# Altium PCB Channel One.PcbDoc
Units mm, origin at the board's own origin, x right, y up, seen from the top; angles counter-clockwise.
Board outline 99.44 x 93.6 mm, 4 copper layers (Signal 1, Power Plane, Ground Plane, Signal 2), stack 0.778 mm thick; 130 components, 100 nets, 521 pads, 35 vias.
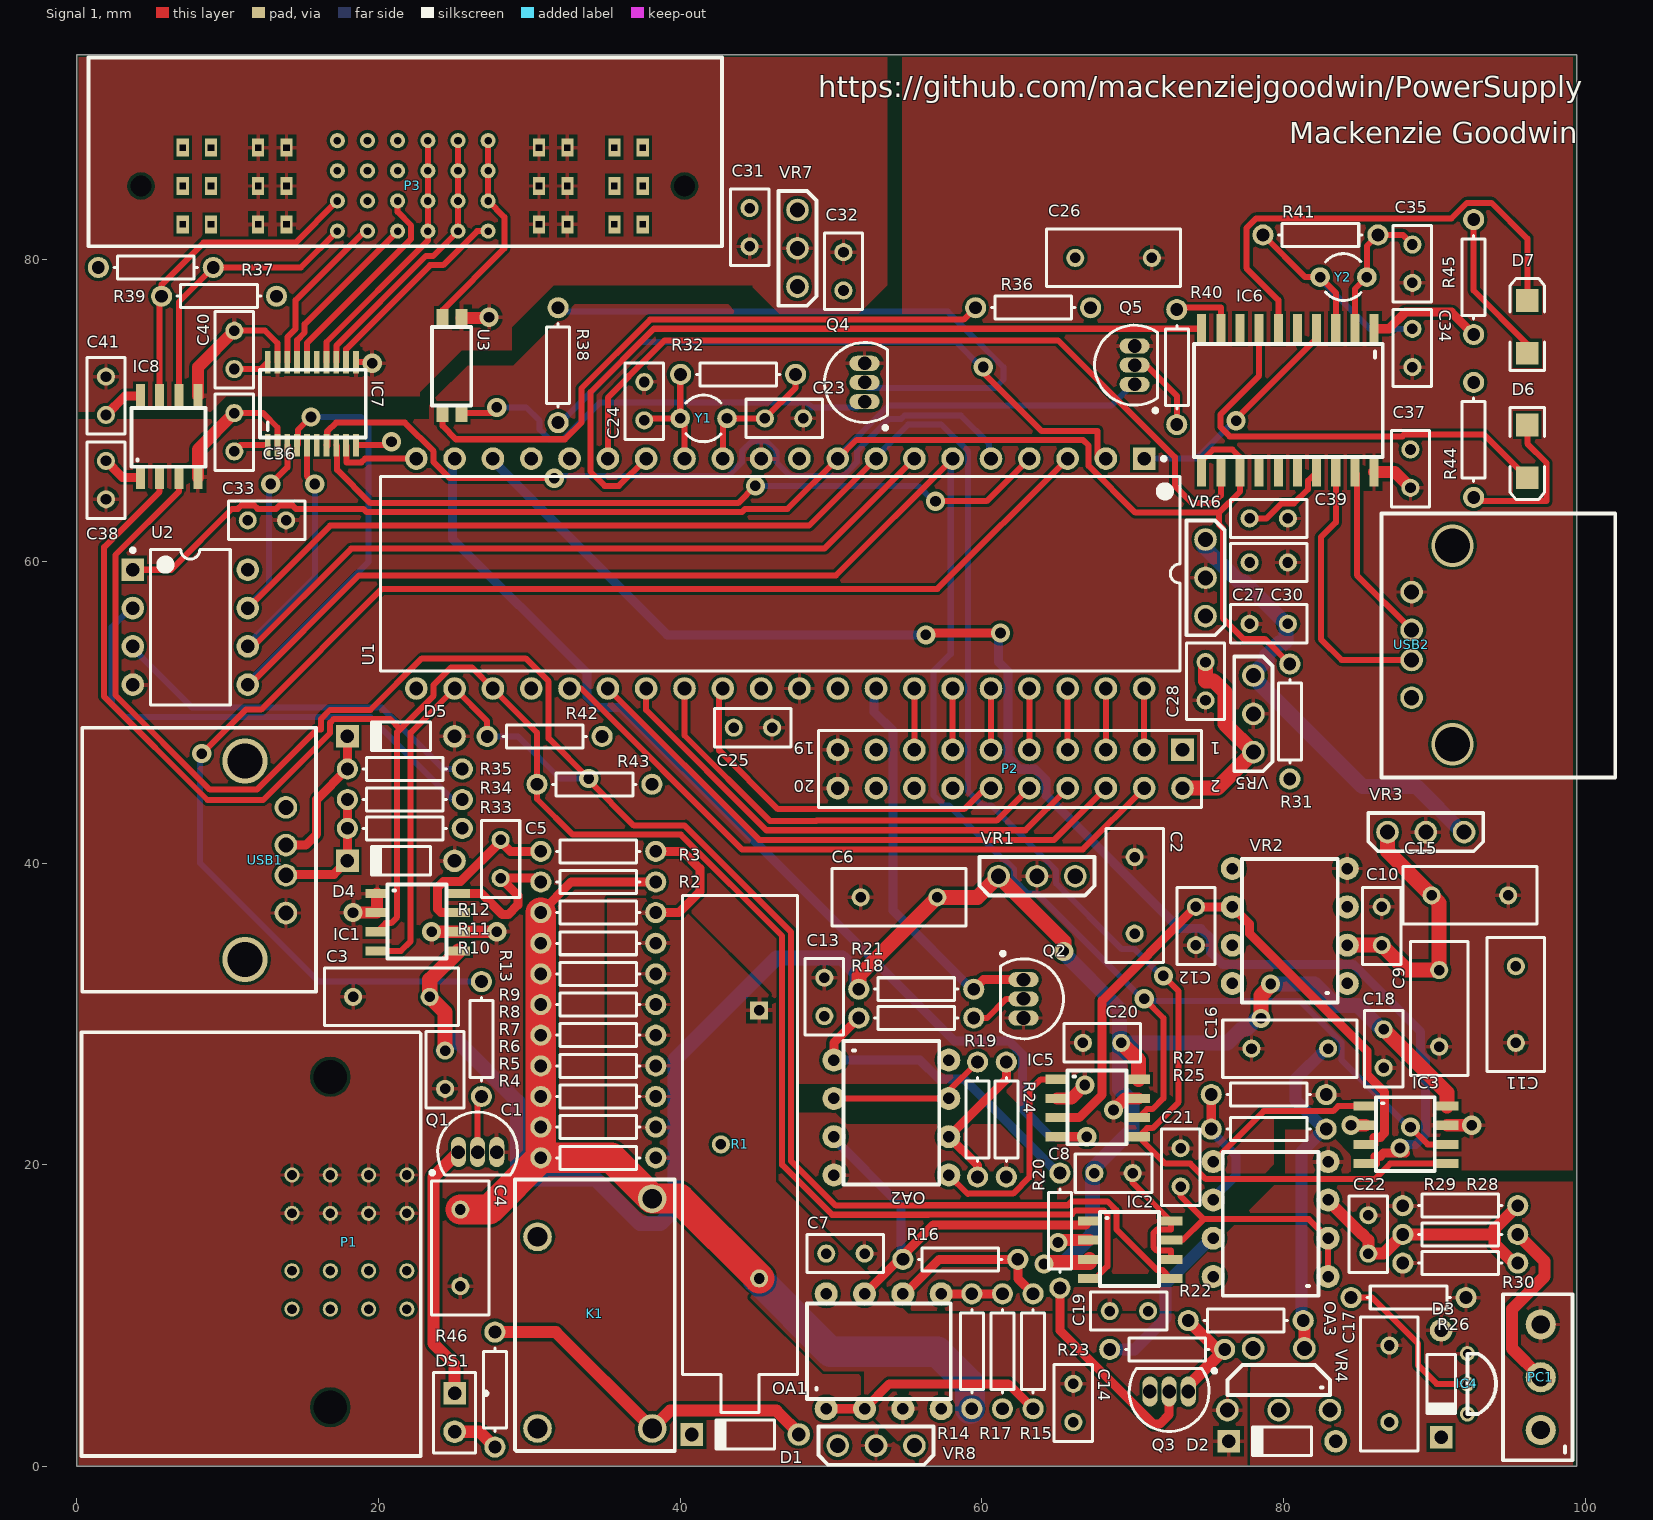
[diagram p0: Signal 1 view]
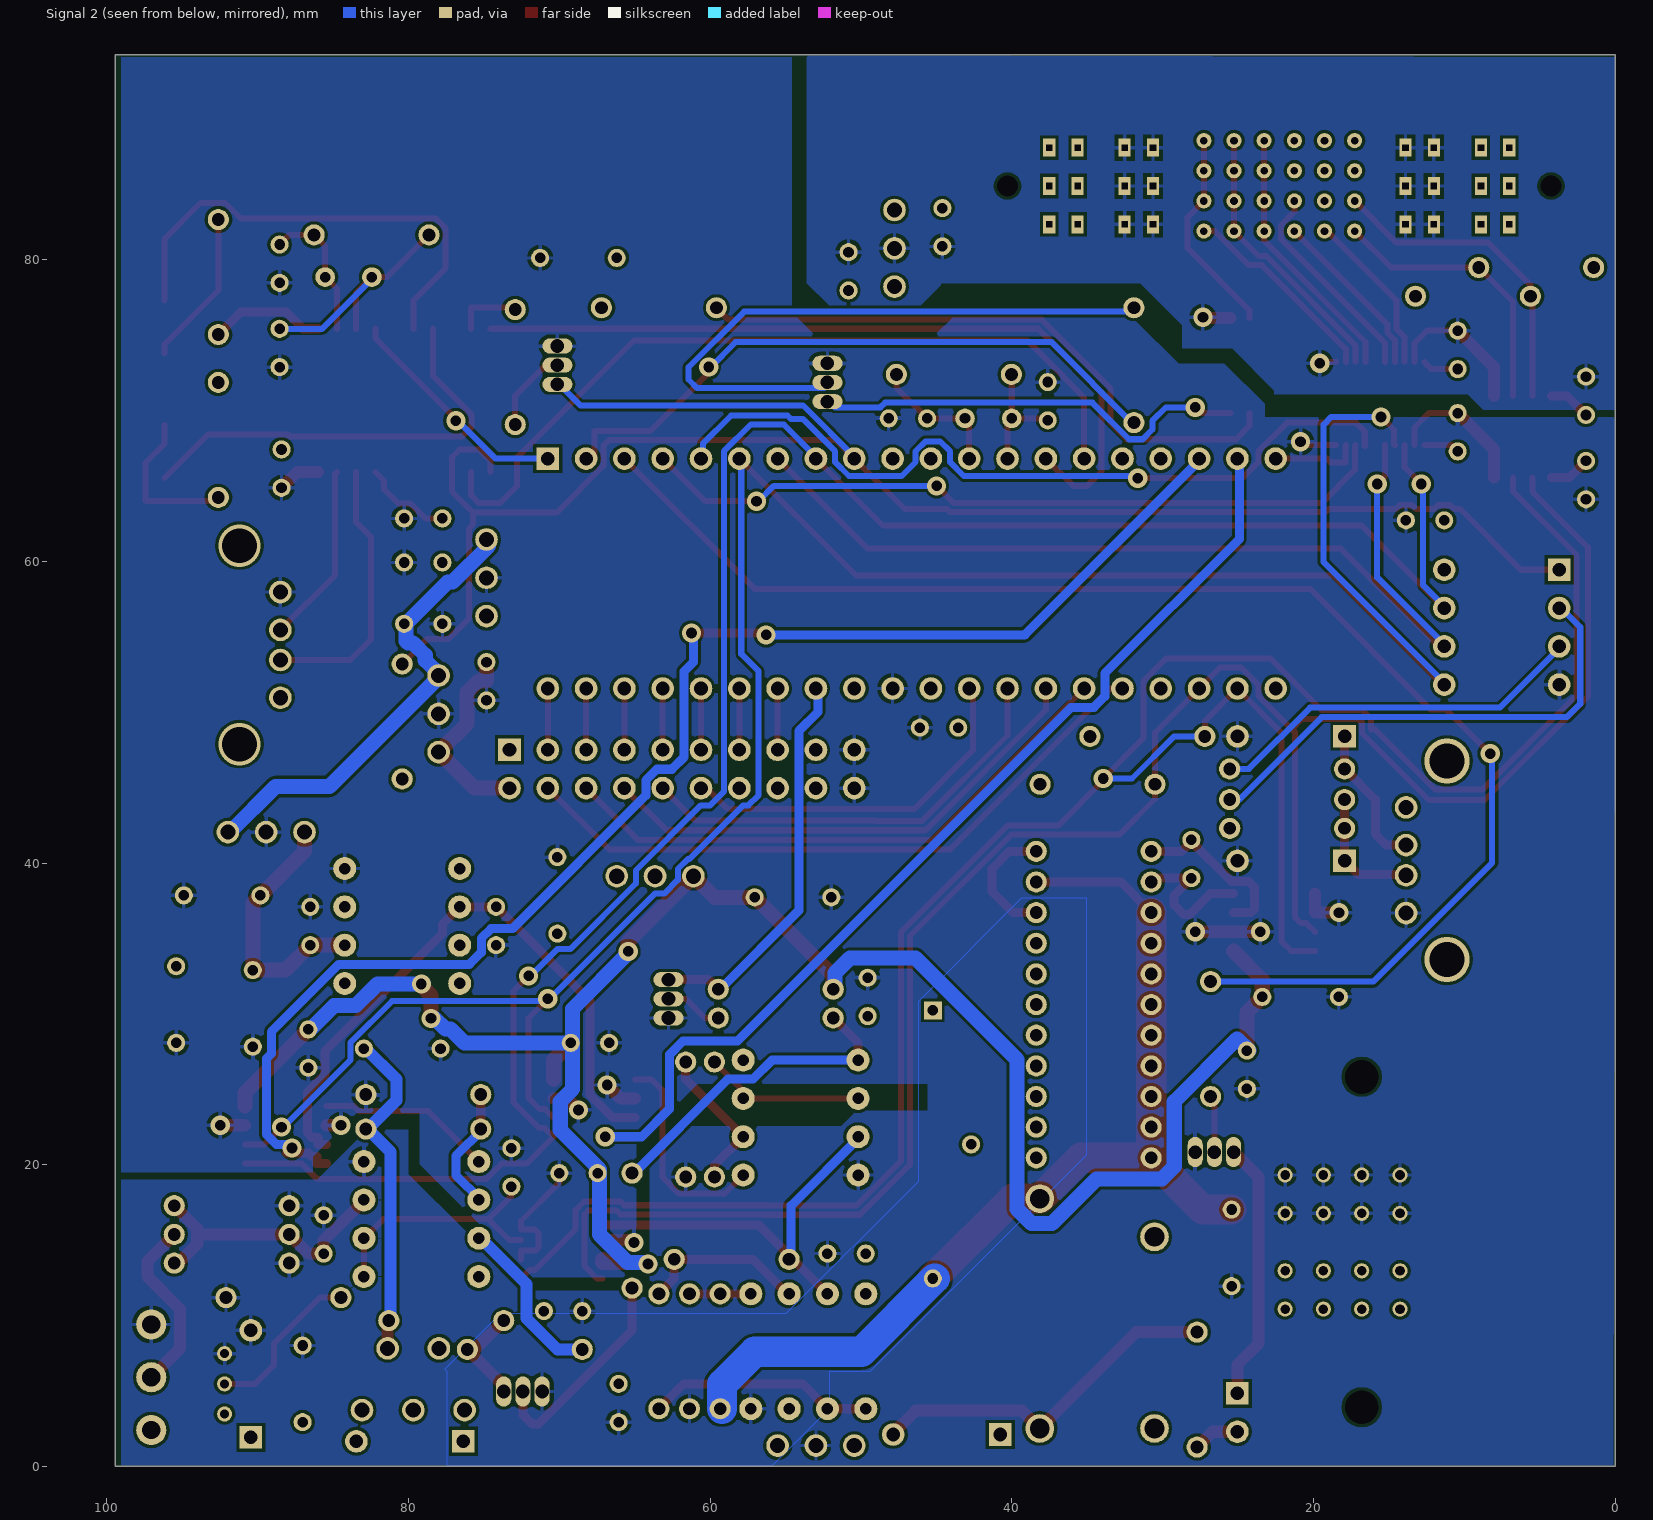
[diagram p1: Signal 2 view, seen from below]
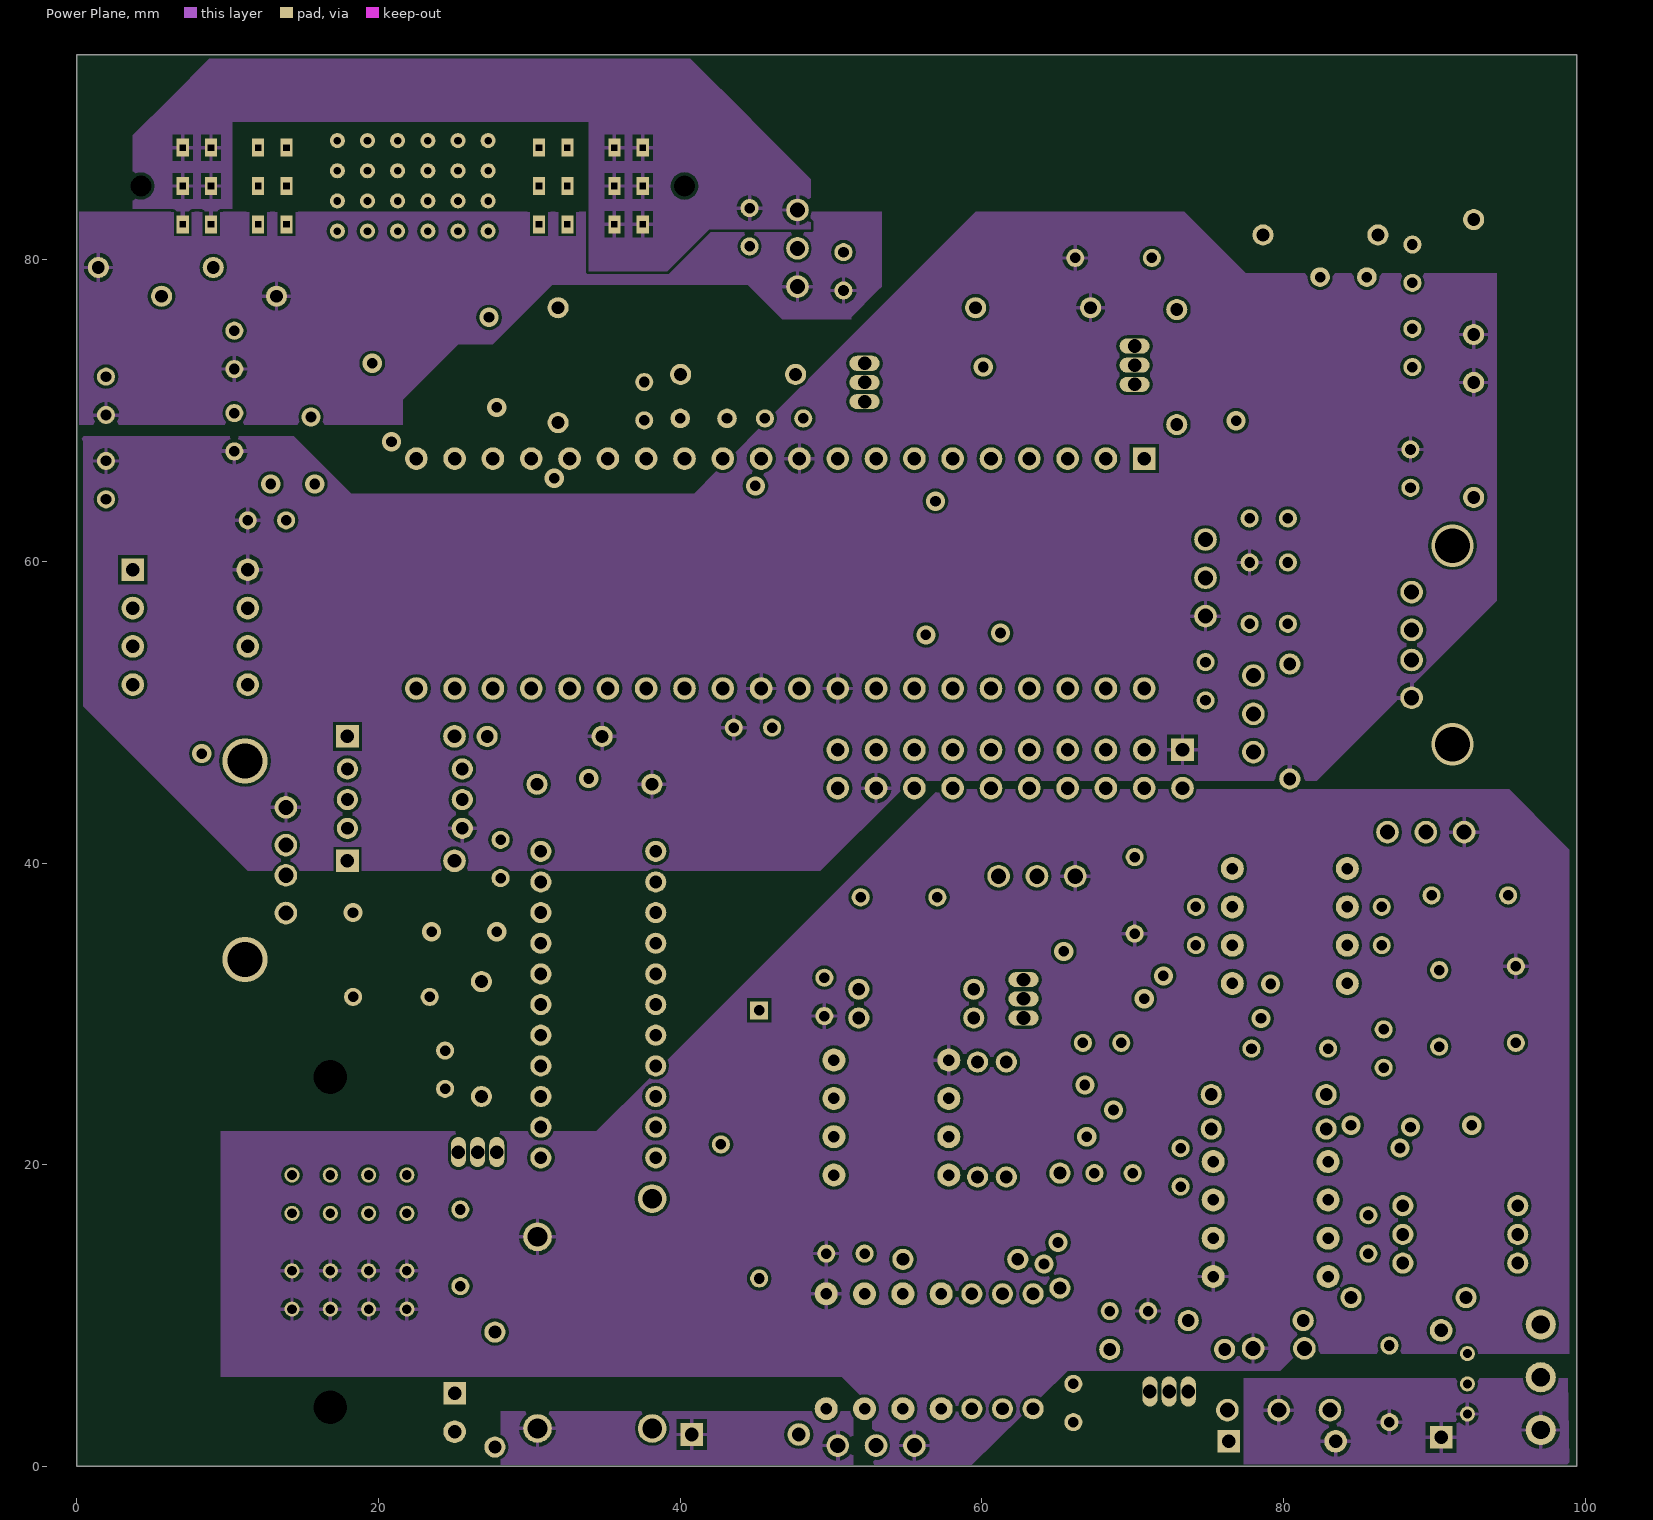
[diagram p2: Power Plane]
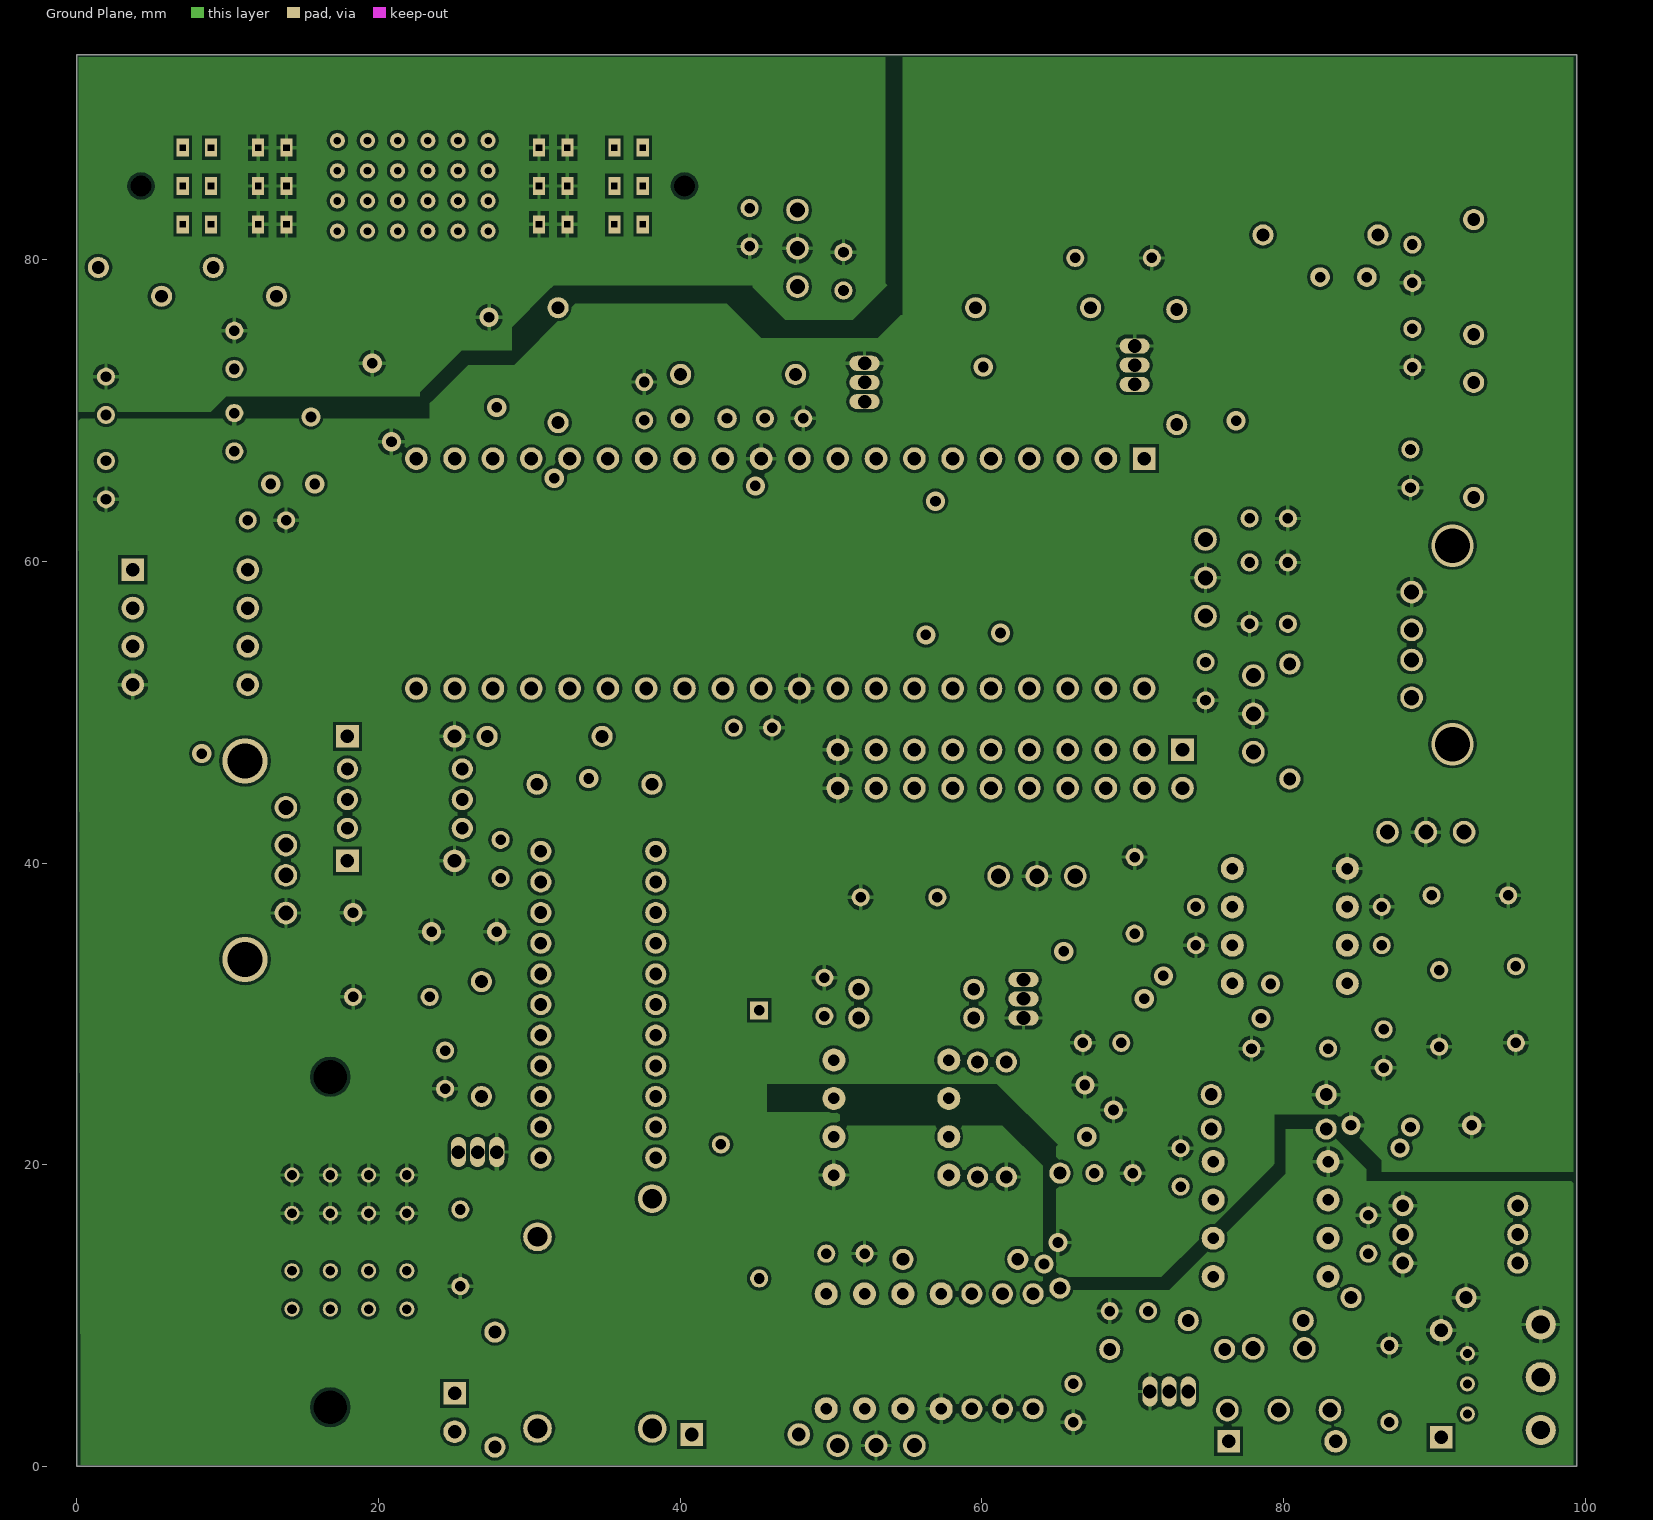
[diagram p3: Ground Plane]

## Layer stack, top to bottom
Top Solder: solder mask 0.0102, Solder Resist, Dk 3.5
Signal 1: signal copper 0.0356
Dielectric 1: core 0.254, FR-4, Dk 4.2
Power Plane: signal copper 0.036
Dielectric 3: prepreg 0.127, Dk 4.2
Ground Plane: signal copper 0.036
Dielectric 2: core 0.254, Dk 4.2
Signal 2: signal copper 0.0356
Bottom Solder: solder mask 0.0102, Solder Resist, Dk 3.5

## Board outline
0,0 99.441,0 99.441,93.599 0,93.599

## Design rules (kind name [scope] priority, off if disabled: settings)
Clearance [All] p1: gap=0.2
PlaneConnect [All] p1: planeconnectstyle=Relief reliefexpansion=0.508 reliefentries=4 reliefconductorwidth=0.3 reliefairgap=0.3
PolygonConnect [All] p1: connectstyle=Relief reliefconductorwidth=0.254 reliefentries=4 polygonreliefangle="90 Angle" airgapwidth=0.254
RoutingVias [All] p1: holewidth=0.711 width=1.27 viastyle="Through Hole" minholewidth=0.711 minwidth=1.27 maxholewidth=0.711 maxwidth=1.27
SolderMaskExpansion [All] p1: expansion=0.102
Width [All] p1: maxlimit=5 minlimit=0.2 preferedwidth=0.6
29 further rules are at their usual default settings.

## Classes and differential pairs
component class Logic: C23 C24 C25 C26 C27 C28 C30 C31 C32 C33 C34 C35 C36 C37 C38 C39 C40 C41 D4 D5 D6 D7 IC6 IC7 IC8 P2 Q4 Q5 R31 R32 R33 R34 R35 R36 R37 R38 R39 R40 R41 R42 R43 R44 R45 U1 U2 U3 USB1 USB2 VR5 VR6 VR7 Y1 Y2
component class Connector: P3
component class "Channel One": C1 C2 C3 C4 C5 C6 C7 C8 C9 C10 C11 C12 C13 C14 C15 C16 C17 C18 C19 C20 C21 C22 D1 D2 D3 DS1 IC1 IC2 IC3 IC4 IC5 K1 OA1 OA2 OA3 P1 PC1 Q1 Q2 Q3 R1 R2 R3 R4 R5 R6 R7 R8 R9 R10 R11 R12 R13 R14 R15 R16 R17 R18 R19 R20 R21 R22 R23 R24 R25 R26 R27 R28 R29 R30 R46 VR1 VR2 VR3 VR4 VR8

## Components (designator, comment, footprint, x,y, rotation, side; value= is the part's Value field where it differs from the comment)
C1 "Cap" RAD-0.1 24.419,26.308 r90 top
C2 "Cap" RAD-0.2 70.139,37.865 r270 top
C3 "Cap" RAD-0.2 20.863,31.134 r0 top
C4 "Cap" RAD-0.2 25.435,14.497 r90 top
C5 "Cap" RAD-0.1 28.102,40.278 r270 top
C6 "Cap" RAD-0.2 54.518,37.738 r0 top
C7 "Cap" RAD-0.1 50.962,14.116 r0 top
C8 "Cap" RAD-0.1 68.742,19.45 r0 top
C9 "Cap" RAD-0.2 90.332,30.372 r90 top
C10 "Cap" RAD-0.1 86.522,35.833 r270 top
C11 "Cap" RAD-0.2 95.412,30.626 r90 top
C12 "Cap" RAD-0.1 74.203,35.833 r90 top
C13 "Cap" RAD-0.1 49.565,31.134 r90 top
C14 "Cap" RAD-0.1 66.075,4.21 r90 top
C15 "Cap" RAD-0.2 92.364,37.865 r180 top
C16 "Cap" RAD-0.2 80.426,27.705 r180 top
C17 "Cap" RAD-0.2 87.03,5.48 r270 top
C18 "Cap" RAD-0.1 86.649,27.705 r90 top
C19 "Cap" RAD-0.1 69.758,10.306 r0 top
C20 "Cap" RAD-0.1 67.98,28.086 r0 top
C21 "Cap" RAD-0.1 73.187,19.831 r90 top
C22 "Cap" RAD-0.1 85.633,15.386 r90 top
C23 "Cap" RAD-0.1 46.898,69.488 r0 top
C24 "Cap" RAD-0.1 37.627,70.631 r90 top
C25 "Cap" RAD-0.1 44.831,48.982 r180 top
C26 "Cap" RAD-0.2 68.742,80.128 r180 top
C27 "Cap" RAD-0.1 79.029,55.871 r0 top
C28 "Cap" RAD-0.1 74.838,52.061 r90 top
C30 "Cap" RAD-0.1 79.029,59.935 r180 top
C31 "Cap" RAD-0.1 44.612,82.16 r90 top
C32 "Cap" RAD-0.1 50.835,79.239 r270 top
C33 "Cap" RAD-0.1 12.608,62.729 r180 top
C34 "Cap" RAD-0.1 88.554,74.159 r90 top
C35 "Cap" RAD-0.1 88.554,79.747 r90 top
C36 "Cap" RAD-0.1 10.449,68.571 r270 top
C37 "Cap" RAD-0.1 88.427,66.158 r270 top
C38 "Cap" RAD-0.1 1.94,65.396 r90 top
C39 "Cap" RAD-0.1 79.029,62.856 r180 top
C40 "Cap" RAD-0.1 10.449,74.032 r270 top
C41 "Cap" RAD-0.1 1.94,70.984 r90 top
D1 "Diode 1N914" DO-35 44.323,2.119 r180 top
D2 "1N4750A" DO-35 79.918,1.67 r180 top
D3 "1N4750A" DO-35 90.459,5.48 r270 top
D4 "BZX79C3V6-ND" DO-35 21.498,40.151 r180 top
D5 "BZX79C3V6-ND" DO-35 21.498,48.406 r180 top
D6 "LTST-C150YKT" 3.2X1.6X1.1 96.174,67.301 r270 top
D7 "LTST-C150EKT" 3.2X1.6X1.1 96.174,75.556 r90 top
DS1 "Lamp" PIN2 25.054,4.845 r270 top
IC1 "INA219" 8-SO 22.768,35.452 r270 top
IC2 "MCP3426A0-E/SN" 8-SO 70.012,13.735 r270 top
IC3 "MAX5541" 8-SO 88.3,21.355 r270 top
IC4 "LM334Z" LM134 92.999,5.48 r90 top
IC5 "MAX5541" 8-SO 67.853,23.133 r270 top
IC6 "MCP2221A" 20-SO 78.394,69.742 r180 top
IC7 "ADUM3151" 20-SSOP 15.91,69.968 r0 top
IC8 "SI8600AC" 8-SO 6.766,68.444 r0 top
K1 "Relay-SPST" MODULE4 31.15,16.021 r90 top
OA1 "LT1638" 8-DIP 53.502,7.385 r0 top
OA2 "LT1638" 8-DIP 53.756,23.133 r270 top
OA3 "LT1638" 8-DIP 79.41,16.402 r90 top
P1 "Power Connector" "Power Connector" 15.91,15.386 r90 top
P2 "Header 10X2" HDR2X10 73.314,47.517 r180 top
P3 "Signal/Power Connector" "Signal/Power Connector" 31.277,81.906 r0 top
PC1 "Terminal Block" "Terminal Block 3" 97.063,6.115 r90 top
Q1 "NPN" TO-226-AA 26.578,20.847 r270 top
Q2 "2N3904" TO-226-AA 62.773,31.007 r180 top
Q3 "2N3904" TO-226-AA 72.425,4.972 r90 top
Q4 "NPN" TO-226-AA 52.232,71.873 r0 top
Q5 "NPN" TO-226-AA 70.139,73.016 r0 top
R1 "3006Y-1-200LF" VR3 43.977,21.355 r270 top
R2 "Res1" AXIAL-0.3 34.579,38.754 r180 top
R3 "Res1" AXIAL-0.3 34.579,40.786 r0 top
R4 "Shunt" AXIAL-0.3 34.579,20.466 r0 top
R5 "Shunt" AXIAL-0.3 34.579,22.498 r0 top
R6 "Shunt" AXIAL-0.3 34.579,24.53 r0 top
R7 "Shunt" AXIAL-0.3 34.579,26.562 r0 top
R8 "Shunt" AXIAL-0.3 34.579,28.594 r0 top
R9 "Shunt" AXIAL-0.3 34.579,30.626 r0 top
R10 "Shunt" AXIAL-0.3 34.579,32.658 r0 top
R11 "Shunt" AXIAL-0.3 34.579,34.69 r0 top
R12 "Shunt" AXIAL-0.3 34.579,36.722 r0 top
R13 "Res1" AXIAL-0.3 26.832,28.34 r270 top
R14 "0.1%" AXIAL-0.3 59.344,7.639 r90 top
R15 "0.1%" AXIAL-0.3 63.408,7.639 r90 top
R16 "0.1%" AXIAL-0.3 58.582,13.735 r180 top
R17 "0.1%" AXIAL-0.3 61.376,7.639 r90 top
R18 "Res" AXIAL-0.3 55.661,29.737 r0 top
R19 "0.1%" AXIAL-0.3 59.725,23.006 r270 top
R20 "Res" AXIAL-0.3 65.186,15.64 r90 top
R21 "Res1" AXIAL-0.3 55.661,31.642 r0 top
R22 "Res" AXIAL-0.3 77.505,9.671 r180 top
R23 "Res" AXIAL-0.3 72.298,7.766 r180 top
R24 "0.1%" AXIAL-0.3 61.63,23.006 r270 top
R25 "0.1%" AXIAL-0.3 79.029,22.371 r180 top
R26 "Res" AXIAL-0.3 88.3,11.195 r0 top
R27 "0.1%" AXIAL-0.3 79.029,24.657 r0 top
R28 "0.1%" AXIAL-0.3 91.729,15.386 r0 top
R29 "0.1%" AXIAL-0.3 91.729,17.291 r0 top
R30 "0.1%" AXIAL-0.3 91.729,13.481 r0 top
R31 "Res1" AXIAL-0.3 80.426,49.394 r270 top
R32 "Res1" AXIAL-0.3 43.85,72.409 r180 top
R33 "Res1" AXIAL-0.3 21.752,42.31 r180 top
R34 "Res1" AXIAL-0.3 21.752,44.215 r180 top
R35 "Res1" AXIAL-0.3 21.752,46.247 r180 top
R36 "Res1" AXIAL-0.3 63.408,76.826 r0 top
R37 "Res1" AXIAL-0.3 5.242,79.493 r180 top
R38 "Res1" AXIAL-0.3 31.912,73.016 r90 top
R39 "Res1" AXIAL-0.3 9.433,77.588 r0 top
R40 "Res1" AXIAL-0.3 72.933,72.889 r90 top
R41 "Res1" AXIAL-0.3 82.458,81.652 r180 top
R42 "Res1" AXIAL-0.3 31.023,48.406 r0 top
R43 "Res1" AXIAL-0.3 34.325,45.231 r0 top
R44 "Res1" AXIAL-0.3 92.618,68.063 r90 top
R45 "Res1" AXIAL-0.3 92.618,78.858 r270 top
R46 "Res1" AXIAL-0.3 27.721,5.099 r90 top
U1 "ATmega164A-PU" 40P6 46.644,59.201 r270 top
U2 "ATtiny45-20PU" 8P3 7.528,55.645 r0 top
U3 "TLP293" 2-SO 25.054,72.254 r0 top
USB1 "UE27AC54100" USB#1 7.909,40.278 r270 top
USB2 "UE27AC54100" USB#2 95.504,54.189 r90 top
VR1 "LM1085" TO220 63.662,39.135 r180 top
VR2 "MAX6225" 8-DIP 80.68,35.833 r90 top
VR3 "NCP7800" TO220 89.443,42.056 r180 top
VR4 "LM3083" LT3083 79.791,5.734 r180 top
VR5 "NCP7800" TO220 78.013,49.902 r270 top
VR6 "LM1085" TO220 74.838,58.919 r270 top
VR7 "LM1085" TO220 47.787,80.763 r270 top
VR8 "NCP7800" TO220 52.994,1.388 r180 top
Y1 "20MHz" R38 41.564,69.488 r270 top
Y2 "12MHz" R38 83.982,78.858 r270 top

## Footprints (in the part's own frame and the unit in brackets; to place one, negate y for a bottom-side part, rotate by r counter-clockwise, add the part's x,y. Pads: shape width x height; smd on the part's side, far side on the other; paste and mask are expansions set on the pad)
2-SO [mm]
  rect 0.8x1.2 smd: 1(-0.8,-2.4) 2(0.47,-2.4) 3(0.47,3.9) 4(-0.8,3.9)
  silkscreen extent -1.5,-1.9 1.1,3.3
3.2X1.6X1.1 [mm] "SMT LED; 2 Flat Leads"
  rect 1.5x1.5 smd: 1(-1.75,0) 2(1.75,0)
  silkscreen extent -2.9,-1.15 3.2,1.15
8-DIP [mil]
  round 60 hole 30: 1(-150,-140) 1(-150,-140) 2(-50,-140) 3(50,-140) 4(150,-140) 5(150,160) 5(150,160) 6(50,160) 7(-50,160) 8(-150,160)
  silkscreen extent -200,-115 175,135
8-SO [mm]
  rect 0.6x1.55 smd: 1(-2.54,-2.86) 2(-1.27,-2.86) 3(0,-2.86) 4(1.27,-2.86) 5(1.27,2.54) 6(0,2.54) 7(-1.27,2.54) 8(-2.54,2.54)
  silkscreen extent -3.13,-2.16 1.77,1.74
8P3 [mm] "DIP, 8-Leads, Row Spacing 7.62mm, Pitch 2.54mm, Body 9.59x6.61mm"
  rect 1.5x1.5 hole 0.9: 1(-3.81,3.81)
  round 1.5 hole 0.9: 2(-3.81,1.27) 3(-3.81,-1.27) 4(-3.81,-3.81) 5(3.81,-3.81) 6(3.81,-1.27) 7(3.81,1.27) 8(3.81,3.81)
  silkscreen extent -3.93,-5.15 2.65,5.23, body extent -3.6,-5.15 3.6,5.15, height 5.34
20-SO [mm]
  rect 0.6x1.95 smd: 1(-7.62,-5.69) 2(-6.35,-5.69) 3(-5.08,-5.69) 4(-3.81,-5.69) 5(-2.54,-5.69) 6(-1.27,-5.69) 7(0,-5.69) 8(1.27,-5.69) 9(2.54,-5.69) 10(3.81,-5.69) 11(3.81,3.81) 12(2.54,3.81) 13(1.27,3.81) 14(0,3.81) 15(-1.27,3.81) 16(-2.54,3.81) 17(-3.81,3.81) 18(-5.08,3.81) 19(-6.35,3.81) 20(-7.62,3.81)
  silkscreen extent -8.19,-4.69 4.31,2.81
20-SSOP [mm]
  rect 0.38x1.5 smd: 1(-3.25,-2.25) 2(-2.6,-2.25) 3(-1.95,-2.25) 4(-1.3,-2.25) 5(-0.65,-2.25) 6(0,-2.25) 7(0.65,-2.25) 8(1.3,-2.25) 9(1.95,-2.25) 10(2.6,-2.25) 11(2.6,3.25) 12(1.95,3.25) 13(1.3,3.25) 14(0.65,3.25) 15(0,3.25) 16(-0.65,3.25) 17(-1.3,3.25) 18(-1.95,3.25) 19(-2.6,3.25) 20(-3.25,3.25)
  silkscreen extent -3.75,-1.75 3.25,2.75
40P6 [mm] "DIP, 40-Leads, Row Spacing 15.24mm, Pitch 2.54mm, Body 52.2x13.95mm"
  rect 1.5x1.5 hole 0.9: 1(-7.62,24.13)
  round 1.5 hole 0.9: 2(-7.62,21.59) 3(-7.62,19.05) 4(-7.62,16.51) 5(-7.62,13.97) 6(-7.62,11.43) 7(-7.62,8.89) 8(-7.62,6.35) 9(-7.62,3.81) 10(-7.62,1.27) 11(-7.62,-1.27) 12(-7.62,-3.81) 13(-7.62,-6.35) 14(-7.62,-8.89) 15(-7.62,-11.43) 16(-7.62,-13.97) 17(-7.62,-16.51) 18(-7.62,-19.05) 19(-7.62,-21.59) 20(-7.62,-24.13) 21(7.62,-24.13) 22(7.62,-21.59) 23(7.62,-19.05) 24(7.62,-16.51) 25(7.62,-13.97) 26(7.62,-11.43) 27(7.62,-8.89) 28(7.62,-6.35) 29(7.62,-3.81) 30(7.62,-1.27) 31(7.62,1.27) 32(7.62,3.81) 33(7.62,6.35) 34(7.62,8.89) 35(7.62,11.43) 36(7.62,13.97) 37(7.62,16.51) 38(7.62,19.05) 39(7.62,21.59) 40(7.62,24.13)
  silkscreen extent -7.74,-26.5 6.45,26.5, body extent -7.05,-26.47 7.05,26.47, height 4.83
AXIAL-0.3 [mm] "Axial Device, Thru-Hole; 2 Leads; 0.3 in Pin Spacing"
  round 1.4 hole 0.85: 1(-3.81,0) 2(3.81,0)
  silkscreen extent -2.77,-0.76 2.77,0.76
DO-35 [mm] "Diode, Axial; Body 3.8 x 1.9 mm (LxDia. max), Lead Dia. 0.53 mm (max)"
  round 1.5 hole 0.9: 1(-3.55,0)
  rect 1.5x1.5 hole 0.9: 2(3.55,0)
  silkscreen extent -1.95,-0.95 2.05,0.95
HDR2X10 [mm] "Connector; Header; 10x2 Position"
  rect 1.5x1.5 hole 0.9: 1(0,0)
  round 1.5 hole 0.9: 2(0,2.54) 3(2.54,0) 4(2.54,2.54) 5(5.08,0) 6(5.08,2.54) 7(7.62,0) 8(7.62,2.54) 9(10.16,0) 10(10.16,2.54) 11(12.7,0) 12(12.7,2.54) 13(15.24,0) 14(15.24,2.54) 15(17.78,0) 16(17.78,2.54) 17(20.32,0) 18(20.32,2.54) 19(22.86,0) 20(22.86,2.54)
  silkscreen extent -1.27,-1.27 24.13,3.81
LM134 [mm] "Constant Current"
  round 1 hole 0.6: 1(-2,0.8) 1(-2,0.8) 2(0,0.8) 3(2,0.8)
  silkscreen extent -2,-1.1 2,0.8
LT3083 [mm] "Adjustable Voltage Regulator"
  round 1.5 hole 1: 1(-3.3,2) 1(-3.3,2) 2(-1.6,-2.1) 2(-1.6,-2.1) 3(0.1,2) 4(1.8,-2.1) 5(3.5,2)
  silkscreen extent -3.3,-1 3.5,1
MODULE4 [mm] "DIP; 4 Round Pins; Row Space 27.94 mm; Pitch 15.24 mm"
  round 1.9 hole 1.3: 1(-0.8,0.6) 2(1.74,-7) 3(-13.5,0.6) 4(-13.5,-7)
  silkscreen extent -15,-8.5 3,2.1
PIN2 [mm] "Photosensitive Diode; 2 Leads"
  rect 1.5x1.5 hole 0.9: 1(0,0)
  round 1.5 hole 0.9: 2(2.54,0)
  silkscreen extent -1.4,-1.4 3.94,2.18
"Power Connector" [mm]
  round 1 hole 0.641: 1(-4.95,-3.44) 1(-4.95,-0.9) 1(-4.95,1.64) 1(-4.95,-5.98) 1(-2.41,-0.9) 1(-2.41,1.64) 1(-2.41,-5.98) 1(-2.41,-3.44) 2(1.4,1.64) 2(1.4,-0.9) 2(1.4,-3.44) 2(1.4,-5.98) 2(3.94,-3.44) 2(3.94,-0.9) 2(3.94,1.64) 2(3.94,-5.98)
  round 0 hole 2.25: NC(-11.46,-0.9) NC(-11.46,-0.9) NC(10.45,-0.9)
  silkscreen extent -14.7,-6.9 13.4,15.6
R38 [mm] "Crystal, Thru-Hole; 2 Leads; Body 3.1 x 8.2 mm (Dia.xH)"
  round 1.3 hole 0.7: 1(0,1.55) 2(0,-1.55)
  silkscreen extent -1.55,-1.19 1.55,1.17
RAD-0.1 [mm] "Radial Cap, Thru-Hole; 2 Leads; 0.1 in Pin Spacing"
  round 1.2 hole 0.7: 1(-1.27,0) 2(1.27,0)
  silkscreen extent -2.54,-1.27 2.54,1.27
RAD-0.2 [mm] "Radial Cap, Thru-Hole; 2 Leads; 0.2 in Pin Spacing"
  round 1.2 hole 0.7: 1(-2.54,0) 2(2.54,0)
  silkscreen extent -4.44,-1.91 4.44,1.91
"Signal/Power Connector" [mm]
  rect 0.8x1.2 hole 0.41 square: 1(-24.25,0.45) 1(-24.25,2.99) 1(-24.25,5.53) 1(-22.37,0.45) 1(-22.37,2.99) 1(-22.37,5.53) 2(-19.25,0.45) 2(-19.25,2.99) 2(-19.25,5.53) 2(-17.37,0.45) 2(-17.37,2.99) 2(-17.37,5.53) 27(-0.63,0.45) 27(-0.63,2.99) 27(-0.63,5.53) 27(1.25,0.45) 27(1.25,2.99) 27(1.25,5.53) 28(4.37,0.45) 28(4.37,2.99) 28(4.37,5.53) 28(6.25,0.45) 28(6.25,2.99) 28(6.25,5.53)
  round 1 hole 0.51: 3(-14,0) 4(-14,2) 5(-14,4) 6(-14,6) 7(-12,0) 8(-12,2) 9(-12,4) 10(-12,6) 11(-10,0) 12(-10,2) 13(-10,4) 14(-10,6) 15(-8,0) 16(-8,2) 17(-8,4) 18(-8,6) 19(-6,0) 20(-6,2) 21(-6,4) 22(-6,6) 23(-4,0) 24(-4,2) 25(-4,4) 26(-4,6)
  round 0 hole 1.41: NC(-27.02,2.99) NC(9.02,2.99)
  silkscreen extent -30.5,-1 11.5,11.5
"Terminal Block 3" [mm]
  round 2 hole 1.2: 1(-3.7,0) 2(-0.2,0) 3(3.3,0)
  silkscreen extent -5.7,-2.1 5.3,2.5
TO220 [mm]
  round 1.5 hole 1: 1(-2.54,0) 1(-2.54,0) 2(0,0) 3(2.54,0)
  silkscreen extent -3.81,-1.27 3.81,1.27
TO-226-AA [mm] "TO, Flat Index; 3 In-Line, Axial Leads; Body Dia. 4.8mm; Leads 0.55 x 0.51 mm (max)"
  oval 2x1 hole 0.9: 1(0,-1.27) 2(0,0) 3(0,1.27)
  silkscreen extent -2.65,-3.13 1.52,2.65, body extent -2.66,-2.66 1.52,2.66, height 5.33
USB#1 [mm]
  round 1.5 hole 1: 1(-3.42,5.96) 2(-0.92,5.96) 3(1.08,5.96) 4(3.585,5.96)
  round 3 hole 2.3: NC(-6.5,3.25) NC(6.66,3.25)
  silkscreen extent -8.7,-7.54 8.8,7.96
USB#2 [mm]
  round 1.5 hole 1: 1(-3.22,7) 2(-0.72,7) 3(1.28,7) 4(3.785,7)
  silkscreen extent -8.5,-6.5 9,9
VR3 [mm] "Thru-Hole; 3 Leads"
  rect 1.2x1.2 hole 0.7: 1(-8.89,1.27)
  round 1.2 hole 0.7: 2(0,-1.27) 3(8.89,1.27)
  silkscreen extent -16.51,-3.81 17.78,3.81

## Part data
C1 C2 C3 C4 C5 C6 C7 C8 C9 C10 C11 C12 C13 C14 C15 C16 C17 C18 C19 C20 C21 C22 C23 C24 C25 C26 C27 C28 C30 C31 C32 C33 C34 C35 C36 C37 C38 C39 C40 C41: "Capacitor"
D1: "High Conductance Fast Diode"
D2 D3 D4 D5: library part "D Schottky", "Schottky Diode"
D6 D7: library part LED2, "Typical RED, GREEN, YELLOW, AMBER GaAs LED"
DS1: "Incandescent Bulb"
IC1: library part "Current Sense"
IC2: library part ADC
IC3 IC5: library part DAC
IC4: library part "Constant Current"
IC6: library part "USB To UART"
IC7: library part "SPI Isolator"
IC8: library part "I2C Isolator"
K1: "Single-Pole Single-Throw Relay"
OA1 OA2 OA3: library part "Operational Amp"
P2: "Header, 10-Pin, Dual row"
Q1 Q4 Q5: "NPN Bipolar Transistor"
Q2 Q3: library part NPN, "NPN Bipolar Transistor"
R1: library part "Res Tap", "Tapped Resistor"
R2 R3 R13 R21 R31 R32 R33 R34 R35 R36 R37 R38 R39 R40 R41 R42 R43 R44 R45 R46: "Resistor"
R4 R5 R6 R7 R8 R9 R10 R11 R12 R14 R15 R16 R17 R18 R19 R20 R22 R23 R24 R25 R26 R27 R28 R29 R30: library part Res1, "Resistor"
U1: "8-bit AVR Microcontroller, 16KB Flash, 512 Bytes EEPROM, 1KB SRAM, 40-pin PDIP, Industrial Grade (-40°C to 85°C)"
U2: "Low Power tinyAVR® 8-Bit Microcontroller, 4K Flash Memory, 20MHz, Industrial Temperature, 8-Lead PDIP, Pb-Free"
U3: library part Optoisolator1, "4-Pin Phototransistor Optocoupler"
USB1 USB2: library part USB
VR1 VR6 VR7: library part "Voltage Regulator 5V"
VR2: library part "Voltage Reference 2.5V"
VR3 VR5 VR8: library part "Voltage Regulator 12V"
VR4: library part "Adjustable Regulator"
Y1 Y2: library part XTAL, "Crystal Oscillator"

## Via types
v1: diameter 1.27, hole 0.711, Signal 1 to Signal 2, 33 vias
v2: diameter 2.8, hole 2.3, Signal 1 to Signal 2, 2 vias

## Nets (pads, with @x,y where several pads share a name; then routed paths per layer and width w, separated by ;. In a path a pad name is that pad's centre, name@x,y a point inside that pad or via, vN(x,y) a via of type N, cw(c..) or ccw(c..) an arc to the next point about the centre after c; other vN are vias at no path point)
2V5: C12.2 IC3.3 IC5.3 VR2.6 | length 42.1
  Signal 1 w0.6: IC5.3 66.456,23.133 67.98,24.657 67.98,30.88 C12.2 VR2.6 77.759,35.96 77.759,35.323 85.549,27.533 85.549,25.979 86.715,24.813 86.715,22.118 86.422,21.825 86.014,21.825 86.014,21.355 IC3.3
5V: C1.2 C3.2 C6.2 C8.1 C18.2 C20.2 IC1.5 IC2.3 IC3.8 IC5.8 R21.1 VR1.3 | length 137.5
  Signal 1 w1: C1.2 24.419,30.118 C3.2 23.403,32.277 IC1.5 ; R21.1 51.851,32.531 C6.2 59.725,37.738 VR1.3 65.44,34.817 v1(65.44,34.154) ; v1(64.135,13.422) 64.228,13.515 67.152,13.515 IC2.3 ; C20.2 70.393,26.943 IC5.8 ; v1(78.521,29.709) 78.521,31.233 79.156,31.868 v1(79.156,31.995) ; C18.2 90.84,24.784 IC3.8
  Signal 2 w1: C1.2@24.292,27.578 25.069,28.356 29.242,24.183 29.242,19.886 30.062,19.066 34.384,19.066 37.339,16.111 38.706,16.111 39.673,17.077 39.673,26.988 46.389,33.704 50.738,33.704 51.724,32.718 R21.1@51.724,31.642 ; v1@64.008,13.422 64.101,13.515 65.485,13.515 67.345,15.375 67.345,19.45 67.345,19.701 69.95,22.306 69.95,24.194 69.123,25.021 C20.2@69.123,28.086 ; v1@65.313,34.154 69.123,30.344 C20.2@69.123,28.086 ; v1@78.394,29.709 78.267,29.709 77.562,29.005 77.22,29.005 76.301,28.086 C20.2@69.123,28.086 ; v1@79.029,31.995 82.069,31.995 83.503,30.561 84.936,30.561 C18.2@86.522,28.975
12V: C9.2 C10.2 C15.2 VR2.2 VR3.3 | length 17.3
  Signal 1 w1: VR2.2 C10.2 88.173,32.912 C9.2 90.332,37.357 C15.2 86.903,40.786 VR3.3
AVR_RESET: IC6.11 IC6.13 Q5.1 R31.1 U1.9 U2.1 | length 121.5
  Signal 1 w0.4: U2.1 6.258,59.455 10.294,63.491 10.685,63.491 10.923,63.729 11.752,63.729 11.99,63.491 13.225,63.491 13.463,63.729 14.292,63.729 14.53,63.491 18.998,63.491 19.217,63.272 44.098,63.272 44.317,63.491 47.124,63.491 U1.9 51.696,68.063 66.71,68.063 67.084,67.689 67.084,66.344 70.191,63.237 75.727,63.237 ; IC6.11 74.584,66.666 75.346,67.428 76.616,67.428 77.124,66.92 IC6.13 77.124,64.634 75.727,63.237 ; R31.1 78.759,54.871 77.344,54.871 75.988,56.228 75.988,62.197 75.727,62.458 75.727,63.237
  Signal 2 w0.4: U1.9@50.327,66.821 53.855,70.349 68.615,70.349 Q5.1@70.012,71.746
C2_5V: C32.2 C40.2 C41.1 IC7.20 IC8.8 R37.2 R39.2 VR7.3 | length 5.2
  Signal 1 w0.4: C40.2 12.204,72.762 IC7.20
  Signal 1 w0.6: C41.1 3.21,70.984 IC8.8
C2_CLIMIT: IC7.12 P3.23 | length 13.5
  Signal 1 w0.4: IC7.12 17.86,74.077 23.438,79.655 24.298,79.655 26.549,81.906 P3.23
C2_CS1: IC7.14 P3.15 P3.16 P3.17 P3.18 | length 17.5
  Signal 1 w0.4: IC7.14 16.56,74.555 23.277,81.272 P3.15 P3.16 P3.17 P3.18
C2_CS2: IC7.13 P3.19 P3.20 P3.21 P3.22 | length 18.3
  Signal 1 w0.4: IC7.13 17.21,74.316 23.149,80.255 23.626,80.255 P3.19 P3.20 P3.21 P3.22
C2_GND: C31.1 C32.1 C40.1 C41.2 IC7.11 IC7.19 IC8.5 P3.2 P3.27 U3.3 VR7.2 | length 12.7
  Signal 1 w0.4: C40.1 12.481,75.302 13.31,74.473 IC7.19 ; IC7.11 19.518,73.218 v1(19.593,73.143)
  Signal 1 w0.8: IC8.5 8.036,72.889 C40.1 ; U3.3 27.303,76.154 v1(27.34,76.191)
C2_MCLIMIT: IC7.9 U1.20 | length 5.9
  Signal 1 w0.4: IC7.9 17.889,67.689 17.889,66.568 18.865,66.568 19.118,66.821 U1.20
C2_MISO: IC7.16 P3.12 | length 13.9
  Signal 1 w0.4: IC7.16 15.26,74.479 22.177,81.396 22.177,82.279 21.277,83.179 P3.12
C2_MOSI: IC7.17 P3.11 | length 11.4
  Signal 1 w0.4: IC7.17 14.61,74.678 15.113,75.181 15.113,75.742 P3.11
C2_RELAYG: P3.24 P3.25 P3.26 U3.4 | length 13.9
  Signal 1 w0.4: U3.4 24.254,76.661 28.356,80.763 28.356,82.827 P3.24 P3.25 P3.26
C2_SCL: IC8.6 P3.3 R37.1 | length 18.7
  Signal 1 w0.4: IC8.6 6.766,77.207 R37.1 14.864,79.493 P3.3
C2_SCLK: IC7.18 P3.7 | length 11
  Signal 1 w0.4: IC7.18 13.96,74.876 14.513,75.429 14.513,77.334 19.085,81.906 P3.7
C2_SDA: IC8.7 P3.4 R39.1 | length 21.4
  Signal 1 w0.4: IC8.7 5.496,77.461 R39.1 5.623,78.35 8.417,81.144 14.515,81.144 P3.4
C2_SWITCH: R38.1 U1.2 | length 43
  Signal 1 w0.4: v1(60.106,72.889) 60.106,72.508 63.951,68.663 67.684,68.663 67.684,66.821 U1.2
  Signal 2 w0.4: R38.1@31.912,69.079 37.373,74.54 58.328,74.54 v1@59.979,72.889
C2_VCC: C31.2 P3.1 P3.28 VR7.1
C_12V: D1.2 K1.3 VR8.3
CLIMIT: Q2.1 R21.2 U1.33 | length 26.2
  Signal 1 w0.6: R21.2 60.106,32.277 Q2.1
  Signal 2 w0.6: U1.33@52.867,51.581 52.867,50.017 54.117,48.767 54.117,36.869 R21.2@59.344,31.642
CS1: IC5.4 U1.19 | length 68.6
  Signal 1 w0.6: IC5.4 v1(66.964,21.863)
  Signal 2 w0.6: U1.19@24.927,66.821 24.927,61.487 33.837,52.577 33.837,51.063 34.569,50.331 36.083,50.331 58.209,28.205 61.811,28.205 62.703,27.313 62.703,23.711 64.551,21.863 v1@66.837,21.863
CS2: IC3.4 U1.18 | length 96.1
  Signal 1 w0.6: v1(56.296,55.137) 56.423,55.264 v1(61.249,55.264) ; IC3.4 86.09,20.085 86.09,20.555 86.422,20.555 86.652,20.785 88.111,20.785 87.776,21.12 v1(87.726,21.12)
  Signal 2 w0.6: U1.18@27.467,66.821 39.151,55.137 v1@56.169,55.137 ; v1@61.122,55.264 61.122,53.329 61.737,52.714 61.737,47.039 62.549,46.227 63.544,46.227 64.277,45.495 64.277,44.499 73.113,35.663 74.531,35.663 75.176,35.018 75.176,34.091 75.982,33.285 84.631,33.285 89.105,28.811 89.105,27.376 89.435,27.046 89.435,22.028 88.77,21.363 88.134,21.363 87.745,20.974 v1@87.599,21.12
GND: C1.1 C2.1 C3.1 C4.1 C6.1 C7.2 C8.2 C9.1 C10.1 C11.1 C12.1 C13.2 C14.1 C15.1 C16.2 C17.1 C18.1 C19.1 C20.1 C21.2 C22.2 C23.2 C24.2 C25.1 C26.1 C27.1 C28.1 C30.1 C33.1 C34.1 C35.1 C36.1 C37.2 C38.1 C39.1 D3.1 D4.1 D5.1 IC1.1 IC1.2 IC1.6 IC2.2 IC2.6 IC2.8 IC3.2 IC3.7 IC4.3 IC5.2 IC5.7 IC6.20 IC7.2 IC7.10 IC8.4 OA1.4 OA2.4 OA3.4 P1.2 P2.19 P2.20 PC1.3 Q1.3 Q2.3 Q3.3 Q4.3 Q5.3 R17.1 R24.2 R26.2 R27.2 R29.1 R30.1 U1.11 U1.31 U2.4 USB1.4 USB2.4 VR1.2 VR2.4 VR3.2 VR5.2 VR6.2 VR8.2 | length 40
  Signal 1 w0.4: C36.1 12.354,69.841 13.31,68.885 IC7.2 ; IC7.10 20.645,67.718 v1(20.863,67.936) ; C8.2 70.012,18.815 IC2.8 72.552,15.705 71.611,15.705 71.377,15.47 71.377,14.539 71.611,14.305 72.552,14.305 IC2.6
  Signal 1 w0.8: IC8.4 8.036,67.428 C36.1 ; v1(18.323,36.722) IC1.2 IC1.1 ; v1(23.53,35.452) IC1.6 v1(27.848,35.452) ; IC5.2 65.948,24.403 v1(66.837,25.292) ; v1(65.059,14.85) 65.059,14.977 65.086,15.005 IC2.2 ; v1(68.742,23.641) 69.504,24.403 IC5.7 ; v1(84.49,22.625) IC3.2 ; IC6.20 87.383,65.932 C37.2 ; IC3.7 v1(92.491,22.625)
GPIO1: P2.3 U1.40 | length 4.1
  Signal 1 w0.4: P2.3 U1.40
GPIO2: P2.5 U1.39 | length 4.1
  Signal 1 w0.4: P2.5 U1.39
GPIO3: P2.7 U1.38 | length 4.1
  Signal 1 w0.4: P2.7 U1.38
GPIO4: P2.9 U1.37 | length 4.1
  Signal 1 w0.4: P2.9 U1.37
GPIO5: P2.11 U1.36 | length 4.1
  Signal 1 w0.4: P2.11 U1.36
GPIO6: P2.13 U1.35 | length 4.1
  Signal 1 w0.4: P2.13 U1.35
GPIO7: P2.15 U1.34 | length 4.1
  Signal 1 w0.4: P2.15 U1.34
GPIO8: P2.17
GPIO9: P2.4 U1.25 | length 44.2
  Signal 1 w0.4: U1.25 33.436,51.581 44.104,40.913 66.71,40.913 P2.4
GPIO10: P2.6 U1.26 | length 38.6
  Signal 1 w0.4: U1.26 45.247,41.548 64.805,41.548 P2.6
GPIO11: P2.8 U1.27 | length 33.8
  Signal 1 w0.4: U1.27 37.754,50.156 45.727,42.183 62.9,42.183 P2.8
GPIO12: P2.10 U1.28 | length 29.2
  Signal 1 w0.4: U1.28 40.294,48.465 45.968,42.79 49.029,42.79 ; 49.057,42.818 60.995,42.818 P2.10
GPIO13: P2.12 U1.29 | length 24.2
  Signal 1 w0.4: U1.29 42.596,51.581 42.596,47.473 46.489,43.58 58.836,43.58 P2.12@60.233,44.977
GPIO14: P2.14
GPIO15: P2.16
ISENSE: IC2.1 OA1.7 OA2.3 R16.2 | length 26.9
  Signal 1 w0.6: OA1.7 56.804,16.021 66.898,16.021 IC2.1
  Signal 2 w0.6: OA2.3@50.073,21.863 54.645,17.291 R16.2@54.645,13.735
ISET: OA2.2 OA2.7 R19.1 | length 10.8
  Signal 1 w0.4: OA2.2 OA2.7 57.82,24.911 R19.1
L_5V: C25.2 C26.2 C30.2 C33.2 C36.2 C37.1 C38.2 IC6.1 IC7.1 IC8.1 P2.1 P2.18 R31.2 R33.1 R36.2 R42.2 R43.2 R44.2 R45.2 U1.10 U1.30 U1.32 U2.8 USB1.1 USB2.1 VR6.3 | length 12.8
  Signal 1 w0.4: C36.2 10.866,67.718 IC7.1
  Signal 1 w0.6: C38.2 3.022,65.584 IC8.1 ; IC6.1 87,75.432 88.098,76.529 91.137,76.529 R45.2
L_12V: C28.2 P2.2 VR5.3 | length 13.3
  Signal 1 w1: P2.2 75.627,44.977 VR5.3 76.138,49.237 76.138,51.33 75.376,52.091 74.838,52.091 C28.2
MCS1: IC7.7 U1.5 | length 53.9
  Signal 1 w0.4: IC7.7 16.61,67.668 16.61,68.624 17.192,69.206 21.754,69.206 23.664,67.297 23.664,66.584 24.725,65.523 v1(31.658,65.523)
  Signal 2 w0.4: v1@31.531,65.523 31.678,65.671 43.183,65.671 44.097,66.584 44.097,67.297 44.77,67.971 45.723,67.971 46.397,67.297 46.397,66.584 47.31,65.671 50.803,65.671 51.717,66.584 51.717,67.297 53.88,69.46 54.658,69.46 54.879,69.682 58.614,69.682 60.487,67.809 U1.5@60.487,66.821
MCS2: IC7.8 U1.4 | length 50.5
  Signal 1 w0.4: IC7.8 17.26,67.668 17.26,66.078 19.466,63.872 43.85,63.872 v1(44.993,65.015) ; v1(56.931,63.999) 60.332,63.999 U1.4
  Signal 2 w0.4: v1@44.866,65.015 55.788,65.015 v1@56.804,63.999
MISO: IC7.5 U1.7 U2.6 | length 64.9
  Signal 1 w0.4: U2.6 11.719,54.375 18.196,60.852 49.565,60.852 U1.7 ; IC7.5 15.26,65.665 v1(15.783,65.142)
  Signal 2 w0.4: U2.6@11.211,54.375 15.783,58.947 15.783,65.015 v1@15.656,65.142
MOSI: IC3.6 IC5.6 IC7.4 U1.6 U2.5 | length 156.6
  Signal 1 w0.4: U2.5 11.465,51.835 18.704,59.074 50.327,59.074 U1.6 ; IC7.4 14.66,67.768 14.66,68.718 v1(15.529,69.587) ; IC5.6 70.963,23.703 71.333,23.703 72.044,24.413 72.044,29.737 v1(70.774,31.007) ; v1(88.427,22.498) 89.57,21.355 IC3.6
  Signal 2 w0.4: U2.5@11.211,51.835 19.339,59.963 19.339,69.079 18.831,69.587 v1@15.402,69.587 ; U1.6@57.947,66.821 57.947,53.881 56.797,52.731 56.797,44.5 57.47,43.827 57.827,43.827 61.369,40.285 61.471,40.285 62.145,39.611 62.145,38.898 63.058,37.985 63.669,37.985 70.647,31.007 70.793,30.861 81.097,30.861 83.839,28.119 83.839,26.959 v1@88.3,22.498
MRXD: IC6.10 U1.14 | length 52.4
  Signal 1 w0.4: U1.14 35.948,65.015 35.005,65.015 34.064,65.956 34.064,71.231 38.264,75.432 IC6.10
MTXD: IC6.12 U1.15 | length 53.6
  Signal 1 w0.4: U1.15 35.214,70.857 36.627,72.27 36.627,72.315 38.979,74.667 65.059,74.667 72.806,66.92 72.806,65.015 73.949,63.872 75.346,63.872 75.854,64.38 IC6.12
NetC5_1: C5.1 IC1.7 R3.1 | length 11.3
  Signal 1 w0.6: IC1.7 24.165,36.722 23.911,36.976 23.911,38.377 24.326,38.792 25.456,38.792 28.102,41.437 28.753,40.786 R3.1
NetC5_2: C5.2 IC1.8 R2.2 | length 9.8
  Signal 1 w0.6: IC1.8 26.832,37.992 28.229,36.595 28.61,36.595 29.245,37.23 29.245,37.865 C5.2 30.515,39.008 R2.2
NetC16_1: C16.1 R22.1 R25.1 VR4.2 | length 22.1
  Signal 1 w0.8: VR4.2@81.391,7.834 R22.1@81.391,9.595
  Signal 2 w0.8: R22.1@81.188,9.671 81.188,20.847 82.712,22.371 80.807,24.276 80.807,25.673 C16.1@82.839,27.705
NetC22_1: C22.1 OA3.3 R28.1 R29.2 R30.2 | length 18.7
  Signal 1 w0.8: OA3.3 82.966,17.626 85.136,15.456 85.182,15.456 85.633,15.005 C22.1 86.649,14.116 R28.1 93.888,15.386 ; R30.2 95.285,13.481 94.015,14.751 94.015,15.767 R29.2
NetC23_1: C23.1 R32.1 U1.12 Y1.1 | length 9.1
  Signal 1 w0.4: U1.12 42.834,69.208 Y1.1 C23.1 47.66,71.52 R32.1
NetC24_1: C24.1 R32.2 U1.13 Y1.2 | length 8.1
  Signal 1 w0.4: C24.1 37.754,69.488 Y1.2 ; R32.2@40.014,72.383 Y1.2 ; U1.13 40.294,69.208 Y1.2
NetC34_2: C34.2 IC6.3 R41.2 Y2.2 | length 16.3
  Signal 1 w0.4: R41.2 81.442,78.858 Y2.2 83.474,77.816 IC6.3
  Signal 2 w0.4: Y2.2@82.305,78.858 85.734,75.429 C34.2@88.427,75.429
NetC35_2: C35.2 IC6.2 R41.1 Y2.1 | length 9.4
  Signal 1 w0.4: IC6.2 84.744,78.07 Y2.1 85.532,80.916 R41.1 87.919,81.652 C35.2
NetC39_2: C39.2 IC6.17 | length 6.1
  Signal 1 w0.4: C39.2 78.884,62.856 79.884,63.856 80.699,63.856 81.634,64.791 81.634,65.362 IC6.17
NetD1_1: D1.1 K1.4 R46.2 | length 24.1
  Signal 1 w0.8: R46.2 31.762,8.909 K1.4 39.331,3.702 46.384,3.702 D1.1@48.035,2.051
NetD4_2: D4.2 R33.2 R34.2 USB1.3 | length 8.5
  Signal 1 w0.6: USB1.3@13.869,39.252 17.049,39.252 D4.2 17.948,44.209 R34.2
NetD5_2: D5.2 R35.2 USB1.2 | length 9.7
  Signal 1 w0.6: USB1.2 15.179,41.198 15.91,41.929 15.91,44.215 R35.2 17.942,48.4 D5.2
NetD6_1: D6.1 R44.1 | length 10.5
  Signal 1 w0.4: R44.1 92.872,63.999 97.444,63.999 97.444,66.539 96.174,67.809 D6.1
NetD7_1: D7.1 R45.1 | length 10.3
  Signal 1 w0.4: R45.1 92.618,77.969 96.174,74.413 D7.1
NetDS1_1: DS1.1 Q1.1 | length 17.3
  Signal 1 w0.8: DS1.1 25.054,6.75 23.657,8.147 23.657,19.196 Q1.1
NetDS1_2: DS1.2 R46.1 | length 3.1
  Signal 1 w0.8: DS1.2 26.705,2.305 R46.1
NetIC4_2: IC4.2 R26.1 | length 10.9
  Signal 1 w0.4: R26.1 85.887,11.195 88.935,8.147 88.935,6.712 90.167,5.48 IC4.2
NetIC5_1: IC5.1 OA2.5 | length 14.2
  Signal 1 w0.4: OA2.5@57.82,19.323 59.09,18.053 59.133,18.096 62.085,18.096 63.154,19.164 63.154,24.911 63.916,25.673 IC5.1
NetIC6_9: IC6.9 R40.2 | length 4.4
  Signal 1 w0.4: R40.2 73.06,76.826 75.854,76.826 IC6.9
NetIC6_18: IC6.18 USB2.2 | length 18.1
  Signal 1 w0.4: IC6.18 83.474,62.602 82.485,61.613 82.485,54.855 83.871,53.469 USB2.2
NetIC6_19: IC6.19 USB2.3 | length 12
  Signal 1 w0.4: IC6.19 84.877,65.799 84.877,59.096 USB2.3
NetOA1_1: OA1.1 OA1.2 R15.1 | length 15.1
  Signal 1 w0.6: OA1.1@49.692,3.829 OA1.2 53.883,5.48 61.757,5.48 R15.1
NetOA1_5: OA1.5 R14.2 R17.2 | length 4.1
  Signal 1 w0.6: OA1.5@57.312,11.449 R14.2 R17.2
NetOA1_6: OA1.6 R15.2 R16.1 | length 11.3
  Signal 1 w0.6: OA1.6 54.899,11.449 57.185,13.735 R16.1 62.392,12.465 R15.2
NetOA2_1: OA2.1 R18.1 R20.2 | length 21.6
  Signal 1 w0.6: OA2.1@50.2,26.943 50.2,28.086 R18.1
  Signal 2 w0.6: OA2.1@50.073,26.943 55.908,26.943 57.17,25.681 58.828,25.681 R20.2@65.059,19.45
NetOA2_6: OA2.6 R19.2 R24.1 | length 10
  Signal 1 w0.6: R19.2 59.725,19.958 OA2.6 61.63,25.673 R24.1
NetOA3_6: OA3.6 R25.2 R27.1 | length 8.4
  Signal 1 w0.6: R25.2 R27.1
  Signal 2 w0.6: R25.2@75.092,22.371 76.87,20.593 76.87,19.323 OA3.6@75.219,17.672
NetOA3_7: OA3.7 R23.2 | length 11.2
  Signal 2 w0.8: R23.2@68.361,7.766 70.139,7.766 72.171,9.798 72.171,12.084 OA3.7@75.219,15.132
NetPC1_2: PC1.2 R28.2 | length 11.9
  Signal 1 w0.8: R28.2 97.317,13.608 97.317,12.592 95.158,10.433 95.158,7.82 PC1.2
NetQ1_2: Q1.2 R13.2 | length 3.8
  Signal 1 w0.4: Q1.2 26.578,24.276 R13.2
NetQ2_2: Q2.2 R18.2 | length 3.8
  Signal 1 w0.4: R18.2 60.36,29.737 61.63,31.007 Q2.2
NetQ3_1: Q3.1 R22.2 R23.1 | length 7
  Signal 1 w0.8: Q3.1 73.695,5.353 R23.1 75.6,7.766 R22.2
NetQ3_2: Q3.2 R20.1 | length 14.4
  Signal 1 w0.6: R20.1 65.186,9.027 71.399,2.813 71.79,2.813 72.425,3.448 Q3.2
NetQ4_1: Q4.1 U3.2 | length 29.4
  Signal 1 w0.4: U3.2 27.48,69.854 v1(27.848,70.222)
  Signal 2 w0.4: v1@27.721,70.222 29.784,70.222 30.685,69.322 30.685,68.751 31.329,68.106 32.24,68.106 34.672,70.538 48.405,70.538 48.72,70.222 51.724,70.222 Q4.1@52.105,70.603
NetQ4_2: Q4.2 R38.2 | length 41.9
  Signal 2 w0.4: R38.2@31.785,76.826 32.039,76.572 57.759,76.572 61.442,72.889 61.442,72.067 60.868,71.492 52.988,71.492 52.988,71.503 52.475,71.503 Q4.2@52.105,71.873
NetQ5_2: Q5.2 R40.1 | length 5.5
  Signal 1 w0.4: Q5.2 70.901,73.016 72.933,70.984 R40.1
NetR34_1: R34.1 U2.2 | length 32.6
  Signal 2 w0.4: U2.2@3.591,56.915 2.321,55.645 2.321,50.565 3.21,49.676 19.466,49.676 24.927,44.215 R34.1@25.435,44.215
NetR35_1: R35.1 U2.3 | length 25.2
  Signal 2 w0.4: U2.3@3.591,54.375 7.655,50.311 20.228,50.311 24.292,46.247 R35.1@25.435,46.247
NetR36_1: R36.1 U3.1 | length 41.5
  Signal 1 w0.4: U3.1 24.254,68.99 25.138,68.106 32.367,68.106 33.464,69.203 33.464,71.48 38.016,76.032 58.803,76.032 R36.1
RXLED: D7.2 IC6.6 | length 31.9
  Signal 1 w0.4: IC6.6 79.664,77.334 77.548,79.45 77.548,82.108 78.192,82.752 91.146,82.752 92.162,83.768 93.804,83.768 96.174,81.398 D7.2
SCL: IC1.4 IC2.5 IC8.3 R42.1 U1.22 | length 154.4
  Signal 1 w0.4: IC8.3 6.766,64.634 2.568,60.436 2.568,51.139 8.829,44.878 11.946,44.878 15.948,48.88 16.198,48.88 16.198,49.57 16.783,50.156 19.462,50.156 22.884,53.578 29.763,53.578 31.284,52.057 31.284,48.272 v1(33.944,45.612) 33.944,45.485 36.943,42.486 40.305,42.486 47.371,35.42 47.371,20.247 50.327,17.291 56.235,17.291 56.265,17.321 65.708,17.321 65.962,17.575 68.341,17.575 68.927,16.989 68.927,15.719 71.611,13.035 71.982,13.035 IC2.5 ; IC1.4 21.498,34.182 22.133,34.817 22.133,48.66 U1.22 27.213,49.422 R42.1
  Signal 2 w0.4: R42.1@27.086,48.406 29.245,48.406 32.039,45.612 v1@33.817,45.612
SCLK: IC3.5 IC5.5 IC7.3 U1.8 U2.7 | length 140.9
  Signal 1 w0.4: U2.7 16.799,62.376 48.549,62.376 U1.8 ; v1(12.862,65.142) 13.96,66.24 IC7.3 ; v1(72.044,32.531) 73.06,31.515 73.06,24.159 71.333,22.433 70.963,22.433 IC5.5 72.171,20.085 73.829,20.085 74.864,19.05 86.045,19.05 87.08,20.085 IC3.5
  Signal 2 w0.4: U2.7@11.211,56.915 12.735,58.439 v1@12.735,65.142 ; U1.8@52.867,66.821 55.128,69.082 57.312,69.082 59.097,67.297 59.097,44.74 60.01,43.827 60.621,43.827 64.925,39.523 64.925,38.658 69.258,34.325 70.123,34.325 v1@71.917,32.531
SDA: IC1.3 IC2.4 IC8.2 R43.1 U1.23 | length 136.4
  Signal 1 w0.4: IC8.2 5.496,64.634 1.813,60.951 1.813,51.045 8.671,44.187 12.354,44.187 16.798,48.631 16.798,49.321 17.032,49.556 20.776,49.556 21.445,48.886 ; IC1.3 20.478,36.022 20.848,36.022 21.244,36.417 21.244,48.684 21.445,48.886 ; IC2.4 67.522,12.465 68.327,13.269 68.327,16.74 68.092,16.975 66.211,16.975 65.977,16.74 65.977,16.721 56.514,16.721 56.484,16.691 50.078,16.691 46.771,19.998 46.771,35.172 40.057,41.886 32.885,41.886 30.515,44.256 R43.1 30.515,48.66 U1.23 26.197,52.978 24.824,52.978 23.664,51.817 23.664,51.104 21.445,48.886
SUPPLY: C4.2 K1.2 R1.3 R2.1 R4.1 R5.1 R6.1 R7.1 R8.1 R9.1 R10.1 R11.1 R12.1 R14.1 | length 67.9
  Signal 1 w0.6: R12.1 32.801,38.754 R2.1
  Signal 1 w2: C4.2 27.34,17.037 R4.1 ; R12.1 R11.1 R10.1 R9.1 R8.1 R7.1 R6.1 R5.1 R4.1 ; R1.3 39.951,17.761 K1.2 35.445,20.466 R4.1
  Signal 2 w2: R1.3@45.12,12.465 49.973,7.611 57.058,7.611 59.217,5.452 R14.1@59.217,3.829
SWITCH: R13.1 U1.3 | length 94.5
  Signal 1 w0.4: v1(8.29,47.263) 11.211,50.184 12.227,50.184 20.228,58.185 57.058,58.185 U1.3
  Signal 2 w0.4: v1@8.163,47.263 8.163,40.024 16.037,32.15 R13.1@26.705,32.15
TXLED: D6.2 IC6.7 | length 29.4
  Signal 1 w0.4: IC6.7 78.394,72.321 75.835,69.762 75.835,68.905 76.441,68.298 87.882,68.298 88.012,68.428 93.297,68.428 D6.2
USB_RST: IC6.4 U1.1 | length 15.4
  Signal 1 w0.4: v1(76.87,69.333) 76.87,69.46 82.204,74.794 IC6.4
  Signal 2 w0.4: U1.1@70.647,66.821 74.23,66.821 v1@76.743,69.333
VCC: C2.2 C7.1 C11.2 C13.1 C19.2 C27.2 K1.1 OA1.8 OA2.8 OA3.8 P1.1 VR1.1 VR3.1 VR4.4 VR5.1 VR6.1 VR8.1 | length 30.9
  Signal 2 w1: VR6.1@74.711,61.459 74.711,61.018 77.093,58.635 77.408,58.635 80.172,55.871 80.172,54.728 80.048,54.604 79.719,54.604 78.899,53.784 78.899,53.455 77.886,52.442 85.252,45.076 88.835,45.076 VR3.1@91.856,42.056
VIN: C14.2 D2.2 OA1.3 R1.1 R3.2 R4.2 R5.2 R6.2 R7.2 R8.2 R9.2 R10.2 R11.2 R12.2 VR4.5 | length 8.4
  Signal 1 w0.6: R12.2 39.913,36.722 41.31,38.119 41.31,39.643 40.167,40.786 R3.2
VOUT: C17.2 D2.1 D3.2 IC4.1 PC1.1 VR4.3
VSENSE: C21.1 IC2.7 OA3.1 OA3.2 | length 16.8
  Signal 1 w0.4: IC2.7 73.314,15.005 74.711,16.402 ; C21.1 73.187,17.926 74.711,16.402 ; OA3.1@82.966,12.592 OA3.2 81.696,16.402 74.711,16.402
VSET: IC3.1 OA3.5 | length 11.6
  Signal 1 w0.4: OA3.5@75.346,20.212 78.691,23.557 83.294,23.557 83.632,23.895 IC3.1
pads on no net: IC6.5 IC6.8 IC6.14 IC6.15 IC6.16 IC7.6 IC7.15 P1.NC P3.5 P3.6 P3.8 P3.9 P3.10 P3.13 P3.14 P3.NC R1.2 U1.16 U1.17 U1.21 U1.24 USB1.NC VR2.1 VR2.3 VR2.5 VR2.7 VR2.8 VR4.1
copper on no net:
  other v2: 91.214,47.889 91.214,61.049

## Polygon pours and split planes (outlines as drawn)
C2_VCC on Power Plane "C2_VCC" (solid, pour order 17): 3.718,81.017 10.195,81.017 10.322,81.144 10.322,89.145 44.612,89.145 44.739,89.272 40.675,93.336 37.5,93.336 8.798,93.336 6.258,90.796 3.718,88.256 3.718,87.875
C2_5V on Power Plane "C2_5V" (solid, pour order 15): 0.162,83.176 0.162,69.079 21.625,69.079 21.625,70.73 24.546,73.651 25.308,74.413 27.594,74.413 31.531,78.35 43.215,78.35 44.485,78.35 46.39,76.445 46.771,76.064 51.343,76.064 51.343,76.191 53.121,77.969 53.375,78.223 53.375,83.176
C2_VCC on Power Plane "C2_VCC" (solid, pour order 13): 33.944,89.78 33.944,79.239 39.151,79.239 41.564,81.652 41.945,82.033 48.676,82.033 48.676,85.335 47.66,86.351 44.231,89.78 33.944,89.78
L_5V on Power Plane "L_5V" (solid, pour order 11): 0.416,67.936 0.416,50.41 11.338,39.488 38.262,39.488 49.311,39.488 55.28,45.457 72.552,45.457 82.204,45.457 87.411,50.664 94.142,57.395 94.142,79.112 77.505,79.112 73.441,83.176 63.662,83.176 59.598,83.176 45.12,68.698 40.929,64.507 19.212,64.507 18.196,64.507 14.386,68.317 11.592,68.317 0.289,68.317
VCC on Power Plane "VCC" (solid, pour order 9): 9.56,22.216 34.452,22.216 54.772,42.536 57.121,44.886 70.393,44.886 73.695,44.886 78.14,44.886 81.95,44.886 94.967,44.886 98.333,41.52 98.968,40.885 98.968,7.484 80.934,7.484 80.045,6.595 79.791,6.341 75.6,6.341 65.694,6.341 59.344,0.118 59.217,0.118 52.74,0.118 52.74,3.928 48.422,8.246 50.708,5.96 9.56,5.96
C_12V on Power Plane "C_12V" (solid, pour order 6): 51.47,0.118 51.47,3.674 28.102,3.674 28.102,0.118
VOUT on Power Plane "VOUT" (solid, remove dead copper, pour order 4): 98.841,5.861 98.968,0.146 77.378,0.146 77.378,5.861 77.505,5.861 84.744,5.861
C2_GND on Ground Plane "C2_GND" (solid, pour order 23): 0.127,69.937 8.89,69.937 9.906,70.953 22.733,70.953 22.733,71.207 25.273,73.747 25.527,74.001 28.829,74.001 28.829,75.525 31.242,77.938 31.623,78.319 44.831,78.319 44.831,78.192 46.99,76.033 51.308,76.033 51.435,76.033 53.721,78.319 53.594,78.446 53.594,93.432 0.127,93.432
GND on Ground Plane "GND" (solid, pour order 21): 0.254,0.118 29.499,0.118 29.499,17.898 33.817,22.216 33.944,22.343 45.755,22.343 45.755,25.391 58.836,25.391 60.995,25.391 65.059,21.327 64.932,21.2 64.932,13.326 64.932,12.691 65.059,12.564 71.917,12.564 79.283,19.93 79.41,20.057 79.41,23.359 83.474,23.359 86.522,20.311 86.522,19.549 99.222,19.549 99.222,93.432 54.772,93.432 54.772,92.701 54.772,76.318 54.645,76.318 53.248,74.921 53.121,74.794 45.882,74.794 45.374,74.794 43.088,77.08 33.563,77.08 33.055,77.08 29.499,73.524 28.991,73.016 26.578,73.016 25.943,73.016 23.657,70.73 23.403,70.476 23.403,69.46 0.127,69.46
GND on Ground Plane "ANALOG" (solid, pour order 12): 99.222,0.118 99.222,18.787 99.095,18.914 85.506,18.914 85.506,19.704 82.839,22.371 82.811,22.343 80.172,22.343 80.172,19.422 72.425,11.675 64.043,11.675 64.043,15.739 64.043,19.93 61.376,22.597 50.581,22.597 50.581,23.486 31.658,23.486 26.451,18.279 26.451,0.118
GND on Signal 1 "GND" (solid, pour order 42): 0.127,0.087 99.187,0.087 99.187,18.883 85.471,18.883 85.471,19.645 82.804,22.312 80.137,22.312 80.137,19.391 72.644,11.898 64.008,11.898 64.008,19.899 61.341,22.566 61.214,22.693 52.451,22.693 51.054,22.693 50.292,23.455 44.323,23.455 44.323,25.36 54.991,25.36 61.087,25.36 65.024,21.423 65.024,12.787 72.136,12.787 79.375,20.026 79.375,23.557 83.42,23.557 86.422,20.555 86.487,20.489 86.487,19.645 99.187,19.645 99.187,20.534 99.187,93.432 54.737,93.432 54.737,76.318 53.086,74.667 53.055,74.636 46.736,74.636 45.593,74.636 43.18,77.049 33.02,77.049 28.956,72.985 26.162,72.985 25.908,72.985 23.368,70.445 23.368,69.429 0.127,69.429
VIN on Signal 1 "VIN" (solid, pour order 36): 35.179,37.679 39.497,37.679 46.355,30.821 46.355,27.646 46.355,18.883 47.752,17.486 55.118,10.12 65.532,10.12 74.041,10.12 77.724,6.437 77.597,6.31 77.597,0.087 56.007,0.087 53.594,2.5 52.197,3.897 52.197,6.31 49.53,6.31 35.179,20.661
C2_GND on Signal 1 "C2_GND" (solid, pour order 27): 0.127,69.937 8.89,69.937 9.906,70.953 22.733,70.953 22.733,71.207 25.527,74.001 28.829,74.001 28.829,75.525 31.623,78.319 44.831,78.319 44.831,78.191 46.99,76.032 47.118,76.16 51.562,76.16 53.721,78.319 53.721,84.796 53.721,93.432 0.127,93.432
VIN on Signal 2 "VIN" (solid, pour order 38): 35.052,37.679 37.211,37.679 39.37,37.679 46.228,30.821 46.228,18.883 54.991,10.12 68.58,10.12 73.914,10.12 77.597,6.437 77.47,6.31 77.47,0.087 55.846,0.087 52.105,3.829 52.07,3.863 52.07,6.31 49.403,6.31 35.052,20.661 35.052,37.679
C2_GND on Signal 2 "C2_GND" (solid, pour order 34): 53.594,93.559 53.594,78.446 52.197,77.049 51.308,76.16 46.863,76.16 44.704,78.319 44.704,78.446 31.496,78.446 28.702,75.652 28.702,74.128 25.4,74.128 22.606,71.334 22.606,71.08 9.779,71.08 8.763,70.064 0,70.064 0,93.432
GND on Signal 2 "GND" (solid, pour order 32): 0.127,0.087 99.06,0.087 99.06,19.01 89.535,19.01 86.072,19.01 82.712,22.371 82.653,22.312 80.01,22.312 80.01,19.391 72.263,11.644 66.04,11.644 64.008,11.644 64.008,15.581 64.008,19.899 61.341,22.566 51.308,22.566 50.292,23.582 45.593,23.582 45.593,25.36 57.912,25.36 60.833,25.36 64.897,21.296 64.897,12.533 71.755,12.533 79.248,20.026 79.248,23.455 83.439,23.455 86.36,20.534 86.36,19.518 99.06,19.518 99.06,93.432 54.61,93.432 54.61,76.414 54.483,76.414 52.832,74.763 45.974,74.763 45.339,74.763 42.926,77.176 32.893,77.176 32.893,77.049 28.956,73.112 25.908,73.112 23.241,70.445 23.241,69.556 0,69.556

## Silkscreen, mask and mechanical layers (free items; w line width, h text height)
Top Overlay:
  text "https://github.com/mackenziejgoodwin/PowerSupply" at 49.149,90.765 h1.4
  text "Mackenzie Goodwin" at 80.391,87.717 h1.4

## Text inside footprints (layer, text, board x,y; h text height)
P2: Top Overlay "2" at 75.854,45.485 h0.8 r180; Top Overlay "1" at 75.854,48.025 h0.8 r180; Top Overlay "19" at 48.93,48.025 h0.8 r180; Top Overlay "20" at 48.93,45.485 h0.8 r180